# Altium PCB PCB-Abanico-MkI.PcbDoc
Units mil, origin at the board's own origin, x right, y up, seen from the top; angles counter-clockwise.
Board outline 397.67 x 9059.14 mil, 2 copper layers (Top Layer, Bottom Layer); 24 components, 15 nets, 72 pads, 0 vias.
Unrouted connection lines stored in the file: 47.
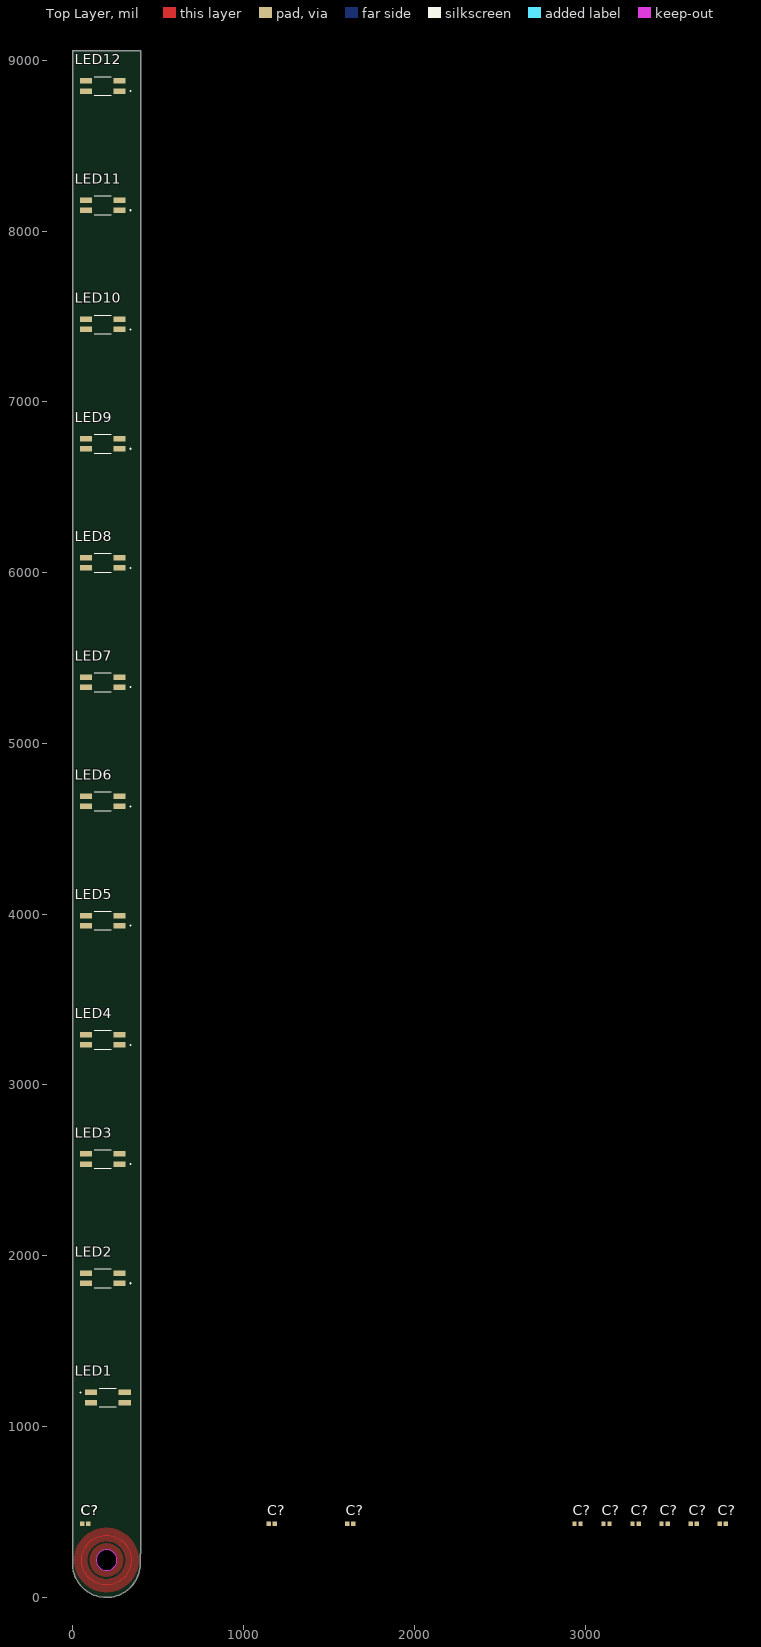
[diagram p0: Top Layer view]
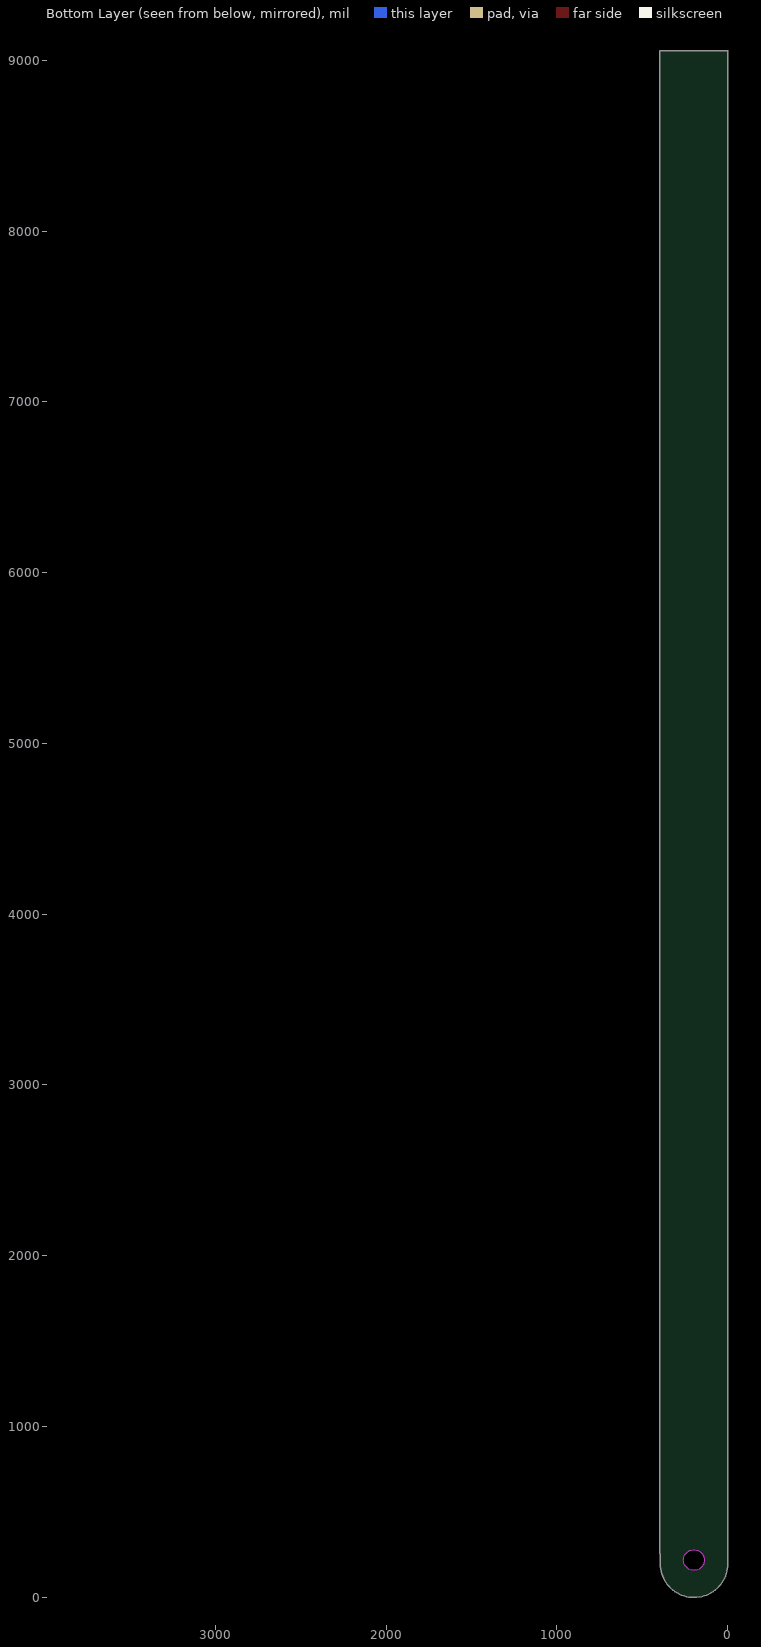
[diagram p1: Bottom Layer view, seen from below]

## Layer stack, top to bottom
Top Solder: solder mask 0.4, Solder Resist, Dk 3.5
Top Layer: signal copper 1.4
Dielectric 1: dielectric 12.6, FR-4, Dk 4.8
Bottom Layer: signal copper 1.4
Bottom Solder: solder mask 0.4, Solder Resist, Dk 3.5

## Board outline
-1.98,194.96 cw(c29.56,194.98) -1.98,195 -1.98,9055 cw(c0,9055) 0,9056.98 393.03,9056.98 cw(c393.7,9055.12) 395.68,9055.12 395.68,254.18 cw(c393.7,254.18) 393.96,252.22 393.96,194.95 cw(c196.98,194.95) 196.98,-2.04 cw(c196.98,-0.05) 195.94,-1.74 cw(c195,0) 195,-1.98 cw(c195,195)
cut-out: 135.83,216.54 ccw(c196.85,216.54) 196.85,155.51 ccw(c196.85,216.54) 257.87,216.54 ccw(c196.85,216.54) 196.85,277.56 ccw(c196.85,216.54)

## Design rules (kind name [scope] priority, off if disabled: settings)
Clearance [All] p1: gap=10 ignorepadtopadclearanceinfootprint=FALSE except(0: Arc-Hole Track-Hole SMDPad-Hole THPad-Hole Via-Hole Fill-Hole Poly-Region Poly-Hole Region-Hole Text-Hole)
PolygonConnect [All] p1: connectstyle=Relief reliefconductorwidth=10 reliefentries=4 polygonreliefangle="90 Angle" airgapwidth=10
RoutingVias [All] p1: holewidth=28 width=50 viastyle="Through Hole" minholewidth=28 minwidth=50 maxholewidth=28 maxwidth=50
SolderMaskExpansion [All] p1: expansion=4 istentingtop=FALSE
Width [All] p1: maxlimit=10 minlimit=10 preferedwidth=10
30 further rules are at their usual default settings.

## Classes and differential pairs
component class PCB-Abanico-MkI: C? LED1 LED2 LED3 LED4 LED5 LED6 LED7 LED8 LED9 LED10 LED11 LED12

## Components (designator, comment, footprint, x,y, rotation, side; value= is the part's Value field where it differs from the comment)
C? "04021A150KAT2A" CAPC1005X56N 1165,430 r0 top
C? "04021A150KAT2A" CAPC1005X56N 71.85,430 r0 top
C? "04021A150KAT2A" CAPC1005X56N 3805,430 r0 top
C? "04021A150KAT2A" CAPC1005X56N 71.85,430 r0 top
C? "04021A150KAT2A" CAPC1005X56N 1625,430 r0 top
C? "04021A150KAT2A" CAPC1005X56N 2955,430 r0 top
C? "04021A150KAT2A" CAPC1005X56N 3635,430 r0 top
C? "04021A150KAT2A" CAPC1005X56N 3125,430 r0 top
C? "04021A150KAT2A" CAPC1005X56N 3295,430 r0 top
C? "04021A150KAT2A" CAPC1005X56N 71.85,430 r0 top
C? "04021A150KAT2A" CAPC1005X56N 71.85,430 r0 top
C? "04021A150KAT2A" CAPC1005X56N 3465,430 r0 top
LED1 "SK6812MINI-E" SK6812MINIE 204.66,1168.78 r0 top
LED2 "SK6812MINI-E" SK6812MINIE 175.2,1867.07 r180 top
LED3 "SK6812MINI-E" SK6812MINIE 175.2,2565.37 r180 top
LED4 "SK6812MINI-E" SK6812MINIE 175.2,3263.66 r180 top
LED5 "SK6812MINI-E" SK6812MINIE 175.2,3961.95 r180 top
LED6 "SK6812MINI-E" SK6812MINIE 175.2,4660.24 r180 top
LED7 "SK6812MINI-E" SK6812MINIE 175.2,5358.54 r180 top
LED8 "SK6812MINI-E" SK6812MINIE 175.2,6056.83 r180 top
LED9 "SK6812MINI-E" SK6812MINIE 175.2,6755.12 r180 top
LED10 "SK6812MINI-E" SK6812MINIE 175.2,7453.41 r180 top
LED11 "SK6812MINI-E" SK6812MINIE 175.2,8151.71 r180 top
LED12 "SK6812MINI-E" SK6812MINIE 175.2,8850 r180 top

## Footprints (in the part's own frame and the unit in brackets; to place one, negate y for a bottom-side part, rotate by r counter-clockwise, add the part's x,y. Pads: shape width x height; smd on the part's side, far side on the other; paste and mask are expansions set on the pad)
CAPC1005X56N [mm]
  rect 0.65x0.64 smd: 1(-0.45,0) 2(0.45,0)
  body extent -0.5,-0.25 0.5,0.25, height 0.56
SK6812MINIE [mm]
  rect 1.8x0.82 smd: 1(-2.5,0.75) 2(-2.5,-0.75) 3(2.5,-0.75) 4(2.5,0.75)
  silkscreen extent -4.15,-1.4 1.25,1.4, body extent -2.94,-1.4 2.94,1.4, height 0.97

## Part data
C? C? C? C? C? C? C? C? C? C? C? C?: "Capacitor", Manufacturer_Name="Kyocera AVX", Mouser Part Number=581-04021A150KAT2A, Datasheet Link=http://www.mouser.com/catalog/supplier/library/pdf/AVXSurfaceMountCeramic.pdf, Height=0.56mm, Manufacturer_Part_Number=04021A150KAT2A, Mouser Price/Stock=https://www.mouser.co.uk/ProductDetail/KYOCERA-AVX/04021A150KAT2A?qs=%252BdQmOuGyFcE6A2cgPfRetA%3D%3D
LED1 LED2 LED3 LED4 LED5 LED6 LED7 LED8 LED9 LED10 LED11 LED12: "LED", Manufacturer_Name="Yellow Stone Corp.", Datasheet Link=http://yushakobo.jp/ds/YS-SK6812MINI-E.pdf, Height=1.88mm, Manufacturer_Part_Number=SK6812MINI-E

## Nets (pads, with @x,y where several pads share a name; then routed paths per layer and width w, separated by ;. In a path a pad name is that pad's centre, name@x,y a point inside that pad or via, vN(x,y) a via of type N, cw(c..) or ccw(c..) an arc to the next point about the centre after c; other vN are vias at no path point)
GND: C?.1@54.13,430 C?.1@1607.28,430 C?.1@2937.28,430 C?.1@3107.28,430 C?.1@3277.28,430 C?.1@3447.28,430 C?.1@3787.28,430 LED1.3 LED2.3 LED3.3 LED4.3 LED6.3 LED7.3 LED8.3 LED9.3 LED10.3 LED12.3
IN: LED1.4
NetLED1_2: LED1.2 LED2.4
NetLED2_2: LED2.2 LED3.4
NetLED3_2: LED3.2 LED4.4
NetLED4_2: LED4.2 LED5.4
NetLED5_2: LED5.2 LED6.4
NetLED6_2: LED6.2 LED7.4
NetLED7_2: LED7.2 LED8.4
NetLED8_2: LED8.2 LED9.4
NetLED9_2: LED9.2 LED10.4
NetLED10_2: LED10.2 LED11.4
NetLED11_2: LED11.2 LED12.4
OUT: LED12.2
VCC: C?.2 LED1.1 LED2.1 LED3.1 LED4.1 LED5.1 LED6.1 LED7.1 LED8.1 LED9.1 LED10.1 LED11.1 LED12.1
pads on no net: C?.1@1147.28,430 C?.1@3617.28,430 LED5.3 LED11.3

## Polygon pours and split planes (outlines as drawn)
no net on Top Solder (solid, pour order 0): 97.79,216.54 ccw(c196.21,216.54) 196.21,118.11 ccw(c196.21,216.54) 294.64,216.54 ccw(c196.21,216.54) 196.21,314.96 ccw(c196.21,216.54)
no net on Top Layer (solid, pour order 4): 196.21,70.87 cw(c196.21,216.54) 50.54,216.54 cw(c196.21,216.54) 196.21,362.2 cw(c196.21,216.54) 341.88,216.54 cw(c196.21,216.54)
no net on Top Layer (solid, pour order 3): 196.21,27.56 cw(c196.21,216.54) 7.24,216.54 cw(c196.21,216.54) 196.21,405.51 cw(c196.21,216.54) 385.19,216.54 cw(c196.21,216.54)
no net on Top Layer (solid, pour order 1): 97.79,216.54 ccw(c196.21,216.54) 196.21,118.11 ccw(c196.21,216.54) 294.64,216.54 ccw(c196.21,216.54) 196.21,314.96 ccw(c196.21,216.54)

## Silkscreen, mask and mechanical layers (free items; w line width, h text height)
Top Solder:
  circle w3.94: c196.21,216.54 r98.43
Mechanical 1:
  circle w3.94: c196.21,216.54 r188.98
  circle w3.94: c196.21,216.54 r145.67
Board:
  circle w3.94: c196.85,216.54 r61.02
  lines w3.94: 195,0 cw(c195,195) 0,195 0,9055 393.7,9055 ; 196.98,-0.05 ccw(c196.98,194.95) 391.98,194.95 391.98,254.18 393.7,254.18 393.7,9055.12